# EAGLE board CT_schematic (EAGLE 7.6.0)

Size 100 x 80 mm. Coordinates in mm from the lower left corner, seen from the top.
Outline: 0,0 100,0 100,80 0,80 0,0
Copper layers (1*16): Top 0.035mm / dielectric 1.5mm / Bottom 0.035mm
Design rules "default": minimum track width 10mil, minimum drill 24mil, track to track 8mil, track to pad 8mil, pad to pad 8mil, via to via 8mil, smd to smd 8mil, copper to edge 40mil, drill to drill 8mil, minimum pad ring 10mil, minimum via ring 8mil, stop-mask expansion 4mil, vias tented up to drill 0mil, thermal gap 10mil

## Footprints (pad centres in the part's own frame; a part is rotated, then mirrored left to right if it is on the bottom)
C0603 = smd 0.8 x 0.8: 1 -0.762,0; 2 0.762,0
C0402 = smd 0.5 x 0.5: 1 -0.508,0; 2 0.508,0
C0805 = smd 1.2 x 1.3: 1 -1.016,0; 2 1.016,0
C1206 = smd 1.3 x 1.6: 1 -1.524,0; 2 1.524,0
L0806 = smd 1.016 x 1.524: 1 -0.889,0; 2 0.889,0
R0603 = smd 0.8 x 0.8: 1 -0.762,0; 2 0.762,0
UFBGA100 = smd 0.28 x 0.28: A1 -2.75,2.75; A2 -2.25,2.75; A3 -1.75,2.75; A4 -1.25,2.75; A5 -0.75,2.75; A6 -0.25,2.75; A7 0.25,2.75; A8 0.75,2.75; A9 1.25,2.75; A10 1.75,2.75; A11 2.25,2.75; A12 2.75,2.75; B1 -2.75,2.25; B2 -2.25,2.25; B3 -1.75,2.25; B4 -1.25,2.25; B5 -0.75,2.25; B6 -0.25,2.25; B7 0.25,2.25; B8 0.75,2.25; B9 1.25,2.25; B10 1.75,2.25; B11 2.25,2.25; B12 2.75,2.25; C1 -2.75,1.75; C2 -2.25,1.75; C3 -1.75,1.75; C4 -1.25,1.75; C5 -0.75,1.75; C8 0.75,1.75; C9 1.25,1.75; C10 1.75,1.75; C11 2.25,1.75; C12 2.75,1.75; D1 -2.75,1.25; D2 -2.25,1.25; D3 -1.75,1.25; D10 1.75,1.25; D11 2.25,1.25; D12 2.75,1.25; E1 -2.75,0.75; E2 -2.25,0.75; E3 -1.75,0.75; E10 1.75,0.75; E11 2.25,0.75; E12 2.75,0.75; F1 -2.75,0.25; F2 -2.25,0.25; F11 2.25,0.25; F12 2.75,0.25; G1 -2.75,-0.25; G2 -2.25,-0.25; G11 2.25,-0.25; G12 2.75,-0.25; H1 -2.75,-0.75; H2 -2.25,-0.75; H3 -1.75,-0.75; H10 1.75,-0.75; H11 2.25,-0.75; H12 2.75,-0.75; J1 -2.75,-1.25; J2 -2.25,-1.25; J3 -1.75,-1.25; J10 1.75,-1.25; J11 2.25,-1.25; J12 2.75,-1.25; K1 -2.75,-1.75; K2 -2.25,-1.75; K3 -1.75,-1.75; K4 -1.25,-1.75; K5 -0.75,-1.75; K8 0.75,-1.75; K9 1.25,-1.75; K10 1.75,-1.75; K11 2.25,-1.75; K12 2.75,-1.75; L1 -2.75,-2.25; L2 -2.25,-2.25; L3 -1.75,-2.25; L4 -1.25,-2.25; L5 -0.75,-2.25; L6 -0.25,-2.25; L7 0.25,-2.25; L8 0.75,-2.25; L9 1.25,-2.25; L10 1.75,-2.25; L11 2.25,-2.25; L12 2.75,-2.25; M1 -2.75,-2.75; M2 -2.25,-2.75; M3 -1.75,-2.75; M4 -1.25,-2.75; M5 -0.75,-2.75; M6 -0.25,-2.75; M7 0.25,-2.75; M8 0.75,-2.75; M9 1.25,-2.75; M10 1.75,-2.75; M11 2.25,-2.75; M12 2.75,-2.75
TST-110-05-T-D-RA = drill 1 pad 1.7 square: 1 0,0 | drill 1 pad 1.7: 2 0,2.54; 3 2.54,0; 4 2.54,2.54; 5 5.08,0; 6 5.08,2.54; 7 7.62,0; 8 7.62,2.54; 9 10.16,0; 10 10.16,2.54; 11 12.7,0; 12 12.7,2.54; 13 15.24,0; 14 15.24,2.54; 15 17.78,0; 16 17.78,2.54; 17 20.32,0; 18 20.32,2.54; 19 22.86,0; 20 22.86,2.54
TDFN-8/6MM = smd 0.3 x 0.75: 1 0,0; 2 0.5,0; 3 1,0; 4 1.5,0; 5 1.5,3; 6 1,3; 7 0.5,3; 8 0,3
S25FL128SDSMFI000 = smd 0.5 x 1.6: 1 0,0; 2 1.27,0; 3 2.54,0; 4 3.81,0; 5 5.08,0; 6 6.35,0; 7 7.62,0; 8 8.89,0; 9 8.89,8.9; 10 7.62,8.9; 11 6.35,8.9; 12 5.08,8.9; 13 3.81,8.9; 14 2.54,8.9; 15 1.27,8.9; 16 0,8.9
QFN-32 = smd 0.6 x 0.3: 1 -2.3,1.75; 2 -2.3,1.25; 3 -2.3,0.75; 4 -2.3,0.25; 5 -2.3,-0.25; 6 -2.3,-0.75; 7 -2.3,-1.25; 8 -2.3,-1.75; 17 2.3,-1.75; 18 2.3,-1.25; 19 2.3,-0.75; 20 2.3,-0.25; 21 2.3,0.25; 22 2.3,0.75; 23 2.3,1.25; 24 2.3,1.75 | smd 0.3 x 0.6: 9 -1.75,-2.3; 10 -1.25,-2.3; 11 -0.75,-2.3; 12 -0.25,-2.3; 13 0.25,-2.3; 14 0.75,-2.3; 15 1.25,-2.3; 16 1.75,-2.3; 25 1.75,2.3; 26 1.25,2.3; 27 0.75,2.3; 28 0.25,2.3; 29 -0.25,2.3; 30 -0.75,2.3; 31 -1.25,2.3; 32 -1.75,2.3 | smd 3.2 x 3.2: EXP 0,0
SJ-43515TS-SMT-TR = smd 2.2 x 3: 1 0.6,-7.4; 4 3.4,-7.4 | smd 3 x 3: 2 12.8,-7.4; 5 17,-3 | smd 2 x 3: 3 5.3,0; 6 2.5,0 | drill 1.8: P$7 4.5,-3.69; P$8 11.54,-3.69
WM-64PC = drill 0.6 pad 1: 1 -1,0.95; 2 -1,-0.95
WFDN-8 = smd 0.48 x 0.7: 1 0,0; 2 1.27,0; 3 2.54,0; 4 3.81,0; 5 3.81,4.45; 6 2.54,4.45; 7 1.27,4.45; 8 0,4.45 | smd 4 x 3: 9 1.89,2.25
FCI_10118193-0001LF = smd 0.4 x 1.35: 1 -1.3,2.675; 2 -0.65,2.675; 3 0,2.675; 4 0.65,2.675; 5 1.3,2.675 | smd 1.6 x 1.4: 6 -3.2,2.45; 7 3.2,2.45 | smd 1.9 x 1.9: 8 -1.2,0; 9 1.2,0 | hole 0.5: -3.3,0; 3.3,0
SOT143B = smd 1 x 0.7: 1 -0.75,-1 | smd 0.6 x 0.7: 2 0.95,-1; 3 0.95,1; 4 -0.95,1
ABS07-32.768KHZ-7-T = smd 1.1 x 2.4: 1 -2.5,0; 2 0,0
ASFL1 = smd 1.7 x 1.5: 1 -1.27,-1.1; 2 1.27,-1.1; 3 1.27,1.1; 4 -1.27,1.1
WSON-8 = smd 0.3 x 0.6: 1 -0.75,0; 2 0.05,0; 3 0.85,0; 4 1.65,0; 5 1.65,3.8; 6 0.85,3.8; 7 0.05,3.8; 8 -0.75,3.8 | smd 3 x 2.6: PAD 0.45,1.9
TSOT-23-5 = smd 1.3 x 0.62: 1 -1.31,0.95; 2 -1.31,0; 3 -1.31,-0.95; 4 1.31,-0.95; 5 1.31,0.95
DFN8_2X3MC = smd 0.813 x 0.305: 1 -1.398,0.75; 2 -1.398,0.25; 3 -1.398,-0.25; 4 -1.398,-0.75; 5 1.398,-0.75; 6 1.398,-0.25; 7 1.398,0.25; 8 1.398,0.75 | smd 1.753 x 1.549: 9 0,0
JST-2-SMD = smd 1 x 4.6: 1 -1,-3.7; 2 1,-3.7 | smd 1.6 x 3.4: NC1 -3.4,1.5; NC2 3.4,1.5
SON-6 = smd 0.55 x 0.3: 1 -0.355,0.5 | smd 0.52 x 0.3: 2 -0.37,0; 3 -0.37,-0.5; 4 0.37,-0.5; 5 0.37,0; 6 0.37,0.5
SW_4-1437565-2 = smd 1.4 x 2.1: 1 -2.23,4.55; 2 -2.23,-4.55; 3 2.23,4.55; 4 2.23,-4.55
LGM67K-G1J2-24-Z = smd 0.8 x 1.4: A -2,0; C 0,0
NC7SZ125M5X = smd 1.3 x 0.7: 1 -1.3,0.95; 2 -1.3,0; 3 -1.3,-0.95; 4 1.3,-0.95; 5 1.3,0.95

## Placement (x,y rotation side)
C1  1e-06  [C0603]  -27.94,85.09 0 top  (outside the outline)
C2  1e-07  [C0603]  -31.75,85.09 0 top  (outside the outline)
C3  1e-07  [C0603]  -35.56,85.09 0 top  (outside the outline)
C4  1e-07  [C0603]  -39.37,85.09 0 top  (outside the outline)
C5  1e-07  [C0603]  -43.18,85.09 0 top  (outside the outline)
C6  1e-07  [C0603]  -46.99,85.09 0 top  (outside the outline)
C7  1e-07  [C0603]  -50.8,85.09 0 top  (outside the outline)
C8  4.7e-06  [C0603]  -24.13,85.09 0 top  (outside the outline)
C9  1e-07  [C0603]  -54.61,85.09 0 top  (outside the outline)
C10  1e-08  [C0603]  -58.42,85.09 0 top  (outside the outline)
C11  1e-06  [C0603]  -62.23,85.09 0 top  (outside the outline)
C12  1e-11  [C0402]  -72.39,90.17 0 top  (outside the outline)
C13  1e-11  [C0402]  -76.2,90.17 0 top  (outside the outline)
C14  1e-07  [C0402]  -80.01,90.17 0 top  (outside the outline)
C15  1e-08  [C0402]  -83.82,90.17 0 top  (outside the outline)
C16  1e-06  [C0603]  -66.04,85.09 0 top  (outside the outline)
C17  1e-06  [C0603]  -69.85,85.09 0 top  (outside the outline)
C18  1e-06  [C0603]  -73.66,85.09 0 top  (outside the outline)
C19  1e-06  [C0603]  -77.47,85.09 0 top  (outside the outline)
C20  1e-06  [C0603]  -81.28,85.09 0 top  (outside the outline)
C21  1e-06  [C0603]  -85.09,85.09 0 top  (outside the outline)
C22  1e-06  [C0603]  -15.24,90.17 0 top  (outside the outline)
C23  1e-06  [C0603]  -19.05,90.17 0 top  (outside the outline)
C24  1e-06  [C0603]  -22.86,90.17 0 top  (outside the outline)
C25  1e-07  [C0402]  -15.24,95.25 0 top  (outside the outline)
C26  1e-07  [C0402]  -19.05,95.25 0 top  (outside the outline)
C27  1e-07  [C0402]  -22.86,95.25 0 top  (outside the outline)
C28  1e-07  [C0402]  -26.67,95.25 0 top  (outside the outline)
C29  1e-06  [C0603]  -26.67,90.17 0 top  (outside the outline)
C30  1e-07  [C0402]  -30.48,95.25 0 top  (outside the outline)
C31  1e-08  [C0402]  -34.29,95.25 0 top  (outside the outline)
C32  1e-08  [C0402]  -38.1,95.25 0 top  (outside the outline)
C33  1e-08  [C0402]  -41.91,95.25 0 top  (outside the outline)
C34  1e-05  [C0805]  -46.99,73.66 0 top  (outside the outline)
C35  1e-05  [C0805]  -52.07,73.66 0 top  (outside the outline)
C36  1e-05  [C0805]  -57.15,73.66 0 top  (outside the outline)
C37  1e-05  [C0805]  -62.23,73.66 0 top  (outside the outline)
C38  1e-07  [C0402]  -45.72,95.25 0 top  (outside the outline)
C39  1e-05  [C1206]  -85.09,66.04 0 top  (outside the outline)
C40  1e-05  [C1206]  -16.51,73.66 0 top  (outside the outline)
C41  1e-08  [C0402]  -49.53,95.25 0 top  (outside the outline)
C42  1e-08  [C0402]  -53.34,95.25 0 top  (outside the outline)
C43  1e-08  [C0402]  -57.15,95.25 0 top  (outside the outline)
I1  1.5e-06  [L0806]  -22.86,73.66 0 top  (outside the outline)
R2  1000.0  [R0603]  -30.48,90.17 0 top  (outside the outline)
R4  4700.0  [R0603]  -34.29,90.17 0 top  (outside the outline)
R5  4700.0  [R0603]  -38.1,90.17 0 top  (outside the outline)
R6  2200.0  [R0603]  -41.91,90.17 0 top  (outside the outline)
R7  2200.0  [R0603]  -45.72,90.17 0 top  (outside the outline)
R8  10000.0  [R0603]  -40.64,80.01 0 top  (outside the outline)
R9  10000.0  [R0603]  -45.72,80.01 0 top  (outside the outline)
R10  10000.0  [R0603]  -50.8,80.01 0 top  (outside the outline)
R11  10000.0  [R0603]  -55.88,80.01 0 top  (outside the outline)
R12  10000.0  [R0603]  -60.96,80.01 0 top  (outside the outline)
R13  10000.0  [R0603]  -66.04,80.01 0 top  (outside the outline)
R14  10000.0  [R0603]  -71.12,80.01 0 top  (outside the outline)
R15  10000.0  [R0603]  -76.2,80.01 0 top  (outside the outline)
R16  1270.0  [R0603]  -49.53,90.17 0 top  (outside the outline)
R17  1270.0  [R0603]  -53.34,90.17 0 top  (outside the outline)
R18  100000.0  [R0603]  -80.01,73.66 0 top  (outside the outline)
R19  100000.0  [R0603]  -85.09,73.66 0 top  (outside the outline)
R20  100000.0  [R0603]  -15.24,80.01 0 top  (outside the outline)
R21  100000.0  [R0603]  -20.32,80.01 0 top  (outside the outline)
R22  200.0  [R0603]  -57.15,90.17 0 top  (outside the outline)
R23  1000.0  [R0603]  -60.96,90.17 0 top  (outside the outline)
R24  220000.0  [R0603]  -25.4,80.01 0 top  (outside the outline)
R25  1000000.0  [R0603]  -74.93,73.66 0 top  (outside the outline)
R26  10000.0  [R0603]  -81.28,80.01 0 top  (outside the outline)
R27  10000.0  [R0603]  -15.24,85.09 0 top  (outside the outline)
R28  9100.0  [R0603]  -64.77,90.17 0 top  (outside the outline)
R29  680000.0  [R0603]  -30.48,80.01 0 top  (outside the outline)
R30  120000.0  [R0603]  -35.56,80.01 0 top  (outside the outline)
R31  2000.0  [R0603]  -68.58,90.17 0 top  (outside the outline)
R32  10000.0  [R0603]  -20.32,85.09 0 top  (outside the outline)
U1  STM32L433VCI6  [UFBGA100]  -44.45,36.83 0 top  (outside the outline)
U2  TST-110-05-T-D-RA  [TST-110-05-T-D-RA]  -46.99,64.77 0 top  (outside the outline)
U3  24AA32AT-I/MNY  [TDFN-8/6MM]  -50.8,46.99 0 top  (outside the outline)
U4  S25FL128SDSMFI000  [S25FL128SDSMFI000]  -31.75,3.81 0 top  (outside the outline)
U5  SGTL5000XNAA3  [QFN-32]  -34.29,48.26 0 top  (outside the outline)
U6  SJ-43515TS-SMT-TR  [SJ-43515TS-SMT-TR]  -59.69,10.16 0 top  (outside the outline)
U7  SJ-43515TS-SMT-TR  [SJ-43515TS-SMT-TR]  -39.37,25.4 0 top  (outside the outline)
U8  SJ-43515TS-SMT-TR  [SJ-43515TS-SMT-TR]  -67.31,25.4 0 top  (outside the outline)
U9  WM-64PCT  [WM-64PC]  -20.32,48.26 0 top  (outside the outline)
U10  SST26VF064B-104I/MF  [WFDN-8]  -82.55,33.02 0 top  (outside the outline)
U11  10118193-0001LF  [FCI_10118193-0001LF]  -53.34,57.15 0 top  (outside the outline)
U12  prtr5v0u2ax  [SOT143B]  -69.85,95.25 0 top  (outside the outline)
U13  ABS07-32.768KHZ-7-T  [ABS07-32.768KHZ-7-T]  -64.77,67.31 0 top  (outside the outline)
U14  ASFL-24.57MHZ-NCS  [ASFL1]  -27.94,58.42 0 top  (outside the outline)
U15  ASFL1-25MHZ-NCS  [ASFL1]  -44.45,58.42 0 top  (outside the outline)
U16  LP3878SDX-ADJ/NOPB  [WSON-8]  -71.12,45.72 0 top  (outside the outline)
U17  ltc3406es5  [TSOT-23-5]  -67.31,73.66 0 top  (outside the outline)
U18  MCP73831T-2ACI/MC  [DFN8_2X3MC]  -80.01,93.98 0 top  (outside the outline)
U19  S2B-PH-SM4-TB(LF)(SN)  [JST-2-SMD]  -58.42,36.83 0 top  (outside the outline)
U20  TPS3895ADRYR  [SON-6]  -73.66,93.98 0 top  (outside the outline)
U21  4-1437565-2  [SW_4-1437565-2]  -27.94,36.83 0 top  (outside the outline)
U22  Q65110A2395  [LGM67K-G1J2-24-Z]  -73.66,66.04 0 top  (outside the outline)
U23  nc7sz125m5x  [NC7SZ125M5X]  -27.94,73.66 0 top  (outside the outline)
U24  nc7sz125m5x  [NC7SZ125M5X]  -34.29,73.66 0 top  (outside the outline)
U25  nc7sz125m5x  [NC7SZ125M5X]  -40.64,73.66 0 top  (outside the outline)

## Library data of the parts
C1-C43 I1 R2 R4-R32 U1-U25 = circuit_tree

## Nets
CLK_CRYSTAL_U1_D1: C12.1 U1.D1 U13.1
CLK_CRYSTAL_U1_E1: C13.1 U1.E1 U13.2
CLK_U1_F1: U1.F1 U15.3
CLK_U5_21: U5.21 U14.3
GND: C1.2 C2.2 C3.2 C4.2 C5.2 C6.2 C7.2 C8.2 C9.2 C10.2 C11.2 C12.2 C13.2 C14.2 C15.2 C16.2 C17.2 C25.2 C26.2 C27.2 C28.2 C29.2 C30.2 C31.2 C32.2 C33.2 C34.2 C35.2 C36.2 C37.1 C37.2 C38.2 C39.2 C40.2 C41.2 C42.2 C43.2 R2.2 R8.2 R11.2 R12.2 R17.2 R23.2 R24.2 R28.2 R30.2 R31.2 U1.D3 U1.E3 U1.F2 U1.F11 U1.F12 U1.J1 U1.K1 U2.4 U2.6 U2.8 U2.10 U2.12 U2.14 U2.16 U2.18 U2.20 U3.4 U3.7 U4.10 U5.1 U5.3 U5.7 U5.EXP U7.1 U8.1 U9.2 U10.4 U10.9 U11.5 U11.6 U11.7 U11.8 U11.9 U12.1 U14.2 U15.2 U16.3 U16.PAD U17.2 U18.6 U18.9 U19.2 U20.2 U22.C U23.2 U23.3 U24.1 U24.3 U25.1 U25.3
INPUT_USBPOWER_5V: C39.1 R32.2 U11.1 U12.4 U18.1 U18.2
NET_U1_A3: R6.1 U1.A3 U3.6
NET_U1_A4: R8.1 U1.A4
NET_U1_B3: R7.1 U1.B3 U3.5
NET_U1_H2: R5.1 U1.H2 U25.4
NET_U1_M11: U22.A
NET_U1_M12: U21.3 U21.4
NET_U3_1: R10.1 U3.1
NET_U3_2: R11.1 U3.2
NET_U3_3: R12.1 U3.3
NET_U4_3: R4.1 U4.3 U24.4
NET_U5_10: C28.1 U5.10
NET_U5_29: R16.1 U5.29
NET_U5_31: R17.1 U5.31
NET_U6_1: U5.4 U6.1
NET_U6_2: U5.2 U6.2
NET_U6_5: U5.6 U6.5
NET_U7_2: C19.1 U7.2
NET_U7_5: C18.1 U7.5
NET_U7_11: C19.2
NET_U7_12: C18.2
NET_U8_2: C21.1 C22.1 U8.2
NET_U8_5: C20.1 U8.5
NET_U8_13: C21.2 C22.2
NET_U8_14: C20.2
NET_U9_1: C23.1 C24.1 C29.1 U5.16 U9.1
NET_U9_15: C23.2 C24.2
NET_U16_1: C33.1 U16.1
NET_U16_6: R22.2 R23.1 U16.6
NET_U16_8: R21.1 U16.8
NET_U17_1: U17.1
NET_U17_3: I1.1 U17.3
NET_U17_5: R24.1 R25.1 U17.5
NET_U17_ATNET_3: I1.2 R25.2
NET_U18_5: R32.1 U18.5
NET_U18_8: R31.1 U18.8
NET_U20_1: R27.1 R28.1 U20.1
NET_U20_3: R29.2 R30.1 U20.3
NET_U20_4: R26.1 U20.4 U23.4 U24.2 U25.2
NET_U21_1: R2.1 U21.1 U21.2
PROC_QUADSPI_BK1_IO0: U1.L9 U10.5
PROC_QUADSPI_BK1_IO1: U1.M5 U10.2
PROC_QUADSPI_BK1_IO2: R19.1 U1.M4 U10.3
PROC_QUADSPI_BK1_IO3: R20.1 U1.L4 U10.7
PROC_QUADSPI_BK1_NCS: R18.1 U1.K3 U10.1
PROC_QUADSPI_BK2_IO0: U1.B7 U4.15
PROC_QUADSPI_BK2_IO1: U1.A6 U4.8
PROC_QUADSPI_BK2_IO2: R14.1 U1.B6 U4.9
PROC_QUADSPI_BK2_IO3: R15.1 U1.A5 U4.1
PROC_QUADSPI_BK2_NCS: R13.1 U1.B8 U4.7
PROC_QUADSPI_CLK: U1.L3 U1.L8 U4.16 U10.6
PROC_SAI1_FS_A: U1.B1 U5.23
PROC_SAI1_SCK_A: U1.C2 U5.24
PROC_SAI1_SD_A: U1.C12 U5.26
PROC_SYS_JTCK_SWCLK: U1.A10 U2.9
PROC_SYS_JTDO_SWO: U1.A8 U2.13
PROC_SYS_JTMS_SWDIO: U1.A11 U2.7
PROC_USB_DM: U1.B12 U11.2 U12.3
PROC_USB_DP: U1.A12 U11.3 U12.2
RST_OUT_U2_SRESET_B: R9.1 U2.15 U23.1
VCC_S1_3V7: C34.1 C36.1 C40.1 R21.2 U16.4 U17.4 U18.3 U18.4 U19.1
VCC_TIER1_1V2: C25.1 C35.1 R22.1 U5.30 U16.5
VCC_TIER1_3V3: C1.1 C2.1 C3.1 C4.1 C5.1 C6.1 C7.1 C8.1 C9.1 C10.1 C11.1 C14.1 C15.1 C16.1 C17.1 C26.1 C27.1 C30.1 C31.1 C32.1 C37.2 C38.1 C41.1 C42.1 C43.1 I1.2 R4.2 R5.2 R6.2 R7.2 R9.2 R10.2 R13.2 R14.2 R15.2 R16.2 R18.2 R19.2 R20.2 R25.2 R26.2 R27.2 R29.1 U1.C4 U1.C11 U1.E2 U1.G2 U1.G11 U1.G12 U1.H3 U1.L1 U1.M1 U2.1 U3.8 U4.2 U4.14 U5.5 U5.20 U10.8 U14.4 U15.4 U20.6 U23.5 U24.5 U25.5

## Tracks (layer width: path | path; a pad name or v marks a point on that pad's centre or on a via)
CLK_CRYSTAL_U1_D1  (2 unrouted)
CLK_CRYSTAL_U1_E1  (2 unrouted)
CLK_U1_F1  (1 unrouted)
CLK_U5_21  (1 unrouted)
GND  (96 unrouted)
INPUT_USBPOWER_5V  (5 unrouted)
NET_U1_A3  (2 unrouted)
NET_U1_A4  (1 unrouted)
NET_U1_B3  (2 unrouted)
NET_U1_H2  (2 unrouted)
NET_U1_M12  (1 unrouted)
NET_U3_1  (1 unrouted)
NET_U3_2  (1 unrouted)
NET_U3_3  (1 unrouted)
NET_U4_3  (2 unrouted)
NET_U5_10  (1 unrouted)
NET_U5_29  (1 unrouted)
NET_U5_31  (1 unrouted)
NET_U6_1  (1 unrouted)
NET_U6_2  (1 unrouted)
NET_U6_5  (1 unrouted)
NET_U7_2  (1 unrouted)
NET_U7_5  (1 unrouted)
NET_U8_2  (2 unrouted)
NET_U8_5  (1 unrouted)
NET_U8_13  (1 unrouted)
NET_U9_1  (4 unrouted)
NET_U9_15  (1 unrouted)
NET_U16_1  (1 unrouted)
NET_U16_6  (2 unrouted)
NET_U16_8  (1 unrouted)
NET_U17_3  (1 unrouted)
NET_U17_5  (2 unrouted)
NET_U17_ATNET_3  (1 unrouted)
NET_U18_5  (1 unrouted)
NET_U18_8  (1 unrouted)
NET_U20_1  (2 unrouted)
NET_U20_3  (2 unrouted)
NET_U20_4  (4 unrouted)
NET_U21_1  (2 unrouted)
PROC_QUADSPI_BK1_IO0  (1 unrouted)
PROC_QUADSPI_BK1_IO1  (1 unrouted)
PROC_QUADSPI_BK1_IO2  (2 unrouted)
PROC_QUADSPI_BK1_IO3  (2 unrouted)
PROC_QUADSPI_BK1_NCS  (2 unrouted)
PROC_QUADSPI_BK2_IO0  (1 unrouted)
PROC_QUADSPI_BK2_IO1  (1 unrouted)
PROC_QUADSPI_BK2_IO2  (2 unrouted)
PROC_QUADSPI_BK2_IO3  (2 unrouted)
PROC_QUADSPI_BK2_NCS  (2 unrouted)
PROC_QUADSPI_CLK  (3 unrouted)
PROC_SAI1_FS_A  (1 unrouted)
PROC_SAI1_SCK_A  (1 unrouted)
PROC_SAI1_SD_A  (1 unrouted)
PROC_SYS_JTCK_SWCLK  (1 unrouted)
PROC_SYS_JTDO_SWO  (1 unrouted)
PROC_SYS_JTMS_SWDIO  (1 unrouted)
PROC_USB_DM  (2 unrouted)
PROC_USB_DP  (2 unrouted)
RST_OUT_U2_SRESET_B  (2 unrouted)
VCC_S1_3V7  (8 unrouted)
VCC_TIER1_1V2  (4 unrouted)
VCC_TIER1_3V3  (64 unrouted)